# Altium PCB OPAMP_DEV_SOT5_6-23.PcbDoc (part 2 of 2)
Units mm, origin at the board's own origin, x right, y up, seen from the top; angles counter-clockwise.
Board outline 91.45 x 80 mm, 4 copper layers (Top Layer, Layer 1, Layer 2, Bottom Layer), stack 1.586 mm thick; 58 components, 23 nets, 145 pads, 362 vias.
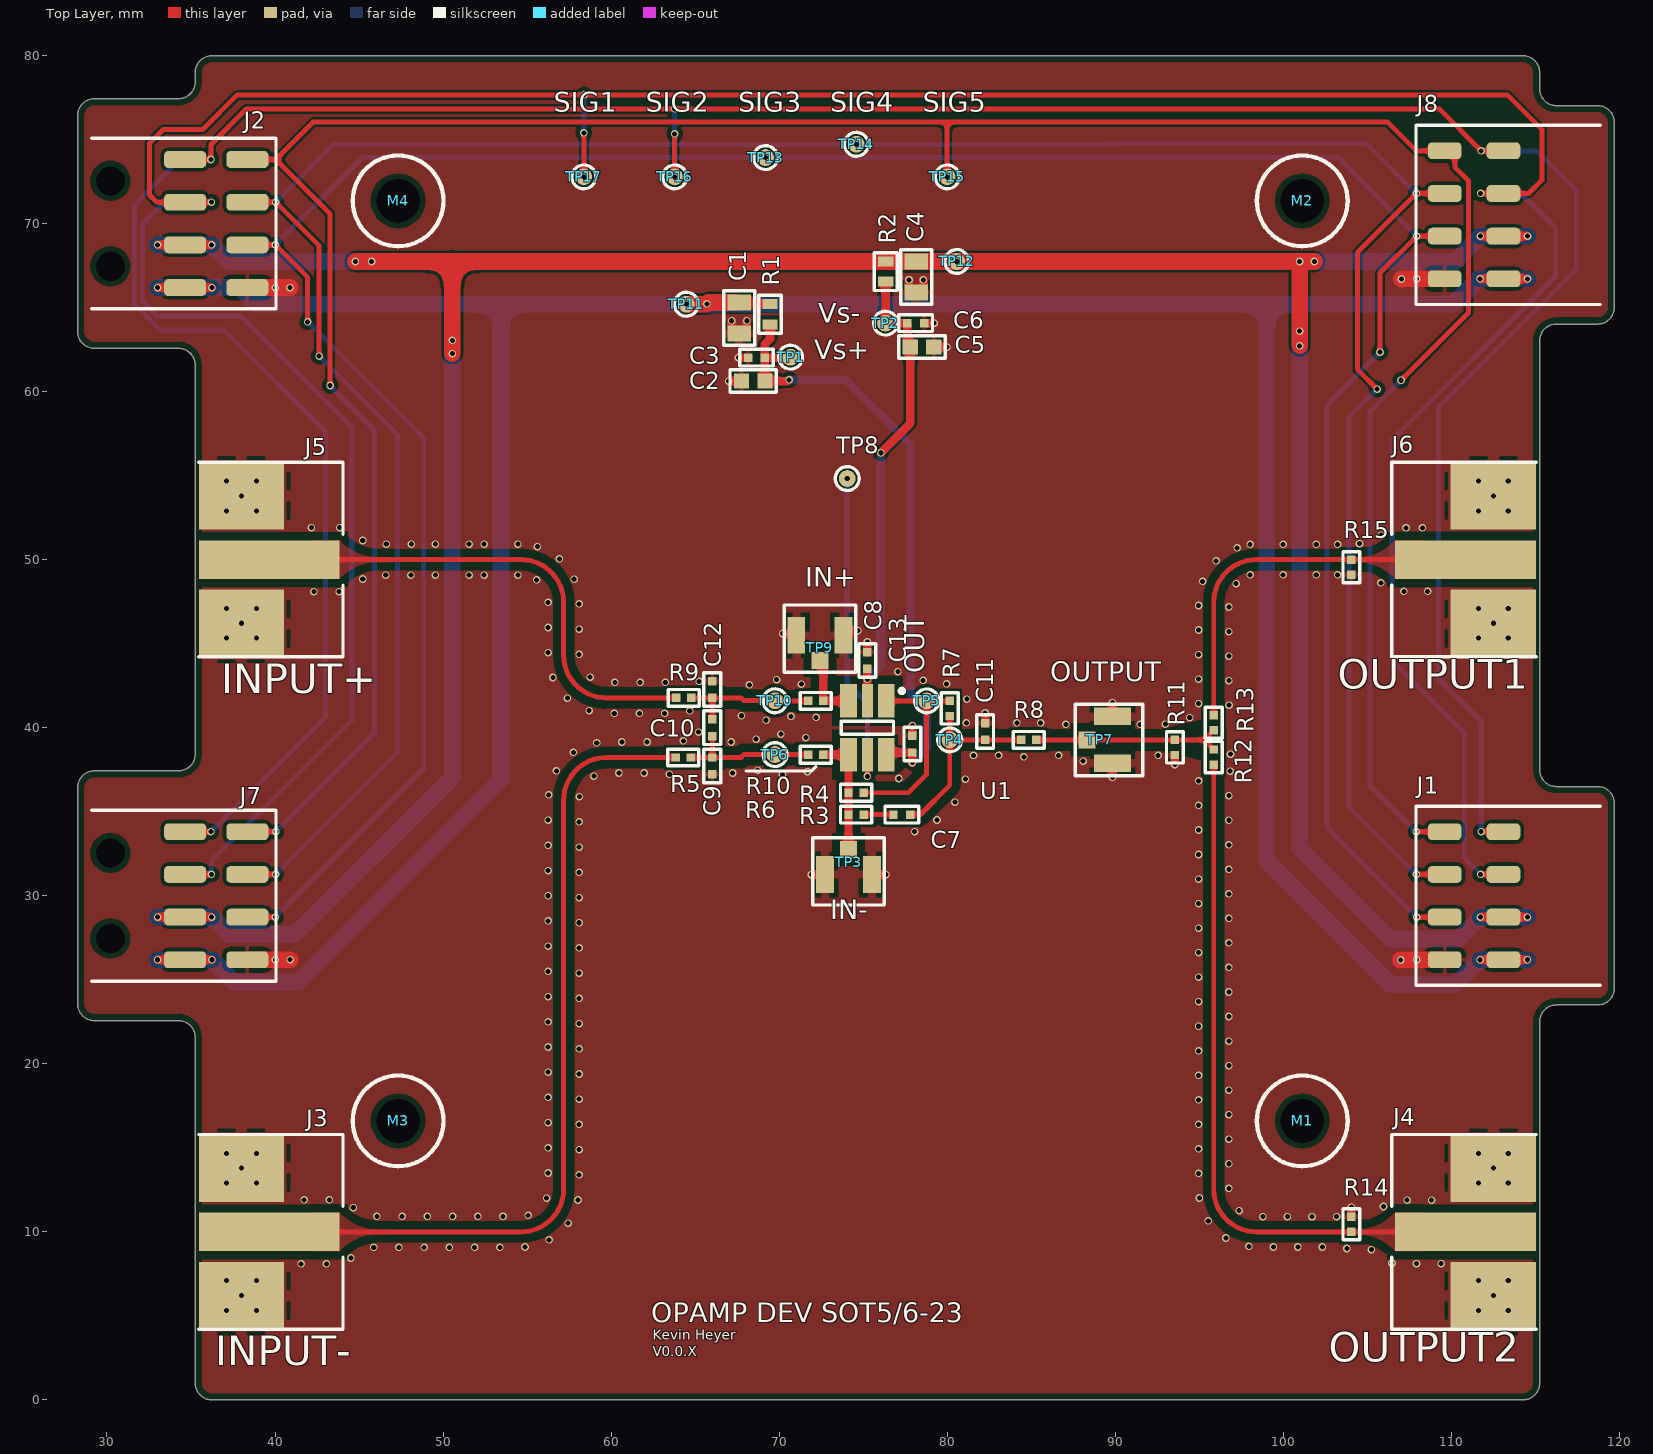
[diagram p0: Top Layer view]

## Other copper (continued)
Bottom Layer: (continued)
  pour cut-out: 112.926,8.574 ccw(c112.926,8.474) 112.926,8.373 113.826,8.373 ccw(c113.826,8.474) 113.826,8.574
  pour cut-out: 111.158,11.426 cw(c111.158,11.526) 111.158,11.627 112.058,11.627 cw(c112.058,11.526) 112.058,11.426
  pour cut-out: 112.926,11.426 cw(c112.926,11.526) 112.926,11.627 113.826,11.627 cw(c113.826,11.526) 113.826,11.426
  pour cut-out: 38.426,43.853 cw(c38.426,43.953) 38.426,44.054 39.326,44.054 cw(c39.326,43.953) 39.326,43.853
  pour cut-out: 36.658,43.853 cw(c36.658,43.953) 36.658,44.054 37.558,44.054 cw(c37.558,43.953) 37.558,43.853
  pour cut-out: 40.906,44.856 cw(c40.805,44.856) 40.705,44.856 40.705,45.756 cw(c40.805,45.756) 40.906,45.756
  pour cut-out: 40.906,46.624 cw(c40.805,46.624) 40.705,46.624 40.705,47.524 cw(c40.805,47.524) 40.906,47.524
  pour cut-out: 40.906,55.144 ccw(c40.805,55.144) 40.705,55.144 40.705,54.244 ccw(c40.805,54.244) 40.906,54.244
  pour cut-out: 40.906,53.376 ccw(c40.805,53.376) 40.705,53.376 40.705,52.476 ccw(c40.805,52.476) 40.906,52.476
  pour cut-out: 38.426,56.147 ccw(c38.426,56.047) 38.426,55.946 39.326,55.946 ccw(c39.326,56.047) 39.326,56.147
  pour cut-out: 36.658,56.147 ccw(c36.658,56.047) 36.658,55.946 37.558,55.946 ccw(c37.558,56.047) 37.558,56.147
  pour cut-out: 38.426,3.853 cw(c38.426,3.953) 38.426,4.054 39.326,4.054 cw(c39.326,3.953) 39.326,3.853
  pour cut-out: 36.658,3.853 cw(c36.658,3.953) 36.658,4.054 37.558,4.054 cw(c37.558,3.953) 37.558,3.853
  pour cut-out: 40.906,4.856 cw(c40.805,4.856) 40.705,4.856 40.705,5.756 cw(c40.805,5.756) 40.906,5.756
  pour cut-out: 40.906,6.624 cw(c40.805,6.624) 40.705,6.624 40.705,7.524 cw(c40.805,7.524) 40.906,7.524
  pour cut-out: 40.906,15.144 ccw(c40.805,15.144) 40.705,15.144 40.705,14.244 ccw(c40.805,14.244) 40.906,14.244
  pour cut-out: 40.906,13.376 ccw(c40.805,13.376) 40.705,13.376 40.705,12.476 ccw(c40.805,12.476) 40.906,12.476
  pour cut-out: 38.426,16.147 ccw(c38.426,16.047) 38.426,15.946 39.326,15.946 ccw(c39.326,16.047) 39.326,16.147
  pour cut-out: 36.658,16.147 ccw(c36.658,16.047) 36.658,15.946 37.558,15.946 ccw(c37.558,16.047) 37.558,16.147
  pour cut-out: 112.074,3.853 ccw(c112.074,3.953) 112.074,4.054 111.174,4.054 ccw(c111.174,3.953) 111.174,3.853
  pour cut-out: 113.842,3.853 ccw(c113.842,3.953) 113.842,4.054 112.942,4.054 ccw(c112.942,3.953) 112.942,3.853
  pour cut-out: 109.594,4.856 ccw(c109.695,4.856) 109.795,4.856 109.795,5.756 ccw(c109.695,5.756) 109.594,5.756
  pour cut-out: 109.594,6.624 ccw(c109.695,6.624) 109.795,6.624 109.795,7.524 ccw(c109.695,7.524) 109.594,7.524
  pour cut-out: 109.594,15.144 cw(c109.695,15.144) 109.795,15.144 109.795,14.244 cw(c109.695,14.244) 109.594,14.244
  pour cut-out: 109.594,13.376 cw(c109.695,13.376) 109.795,13.376 109.795,12.476 cw(c109.695,12.476) 109.594,12.476
  pour cut-out: 112.074,16.147 cw(c112.074,16.047) 112.074,15.946 111.174,15.946 cw(c111.174,16.047) 111.174,16.147
  pour cut-out: 113.842,16.147 cw(c113.842,16.047) 113.842,15.946 112.942,15.946 cw(c112.942,16.047) 112.942,16.147
  pour cut-out: 112.074,43.853 ccw(c112.074,43.953) 112.074,44.054 111.174,44.054 ccw(c111.174,43.953) 111.174,43.853
  pour cut-out: 113.842,43.853 ccw(c113.842,43.953) 113.842,44.054 112.942,44.054 ccw(c112.942,43.953) 112.942,43.853
  pour cut-out: 109.594,44.856 ccw(c109.695,44.856) 109.795,44.856 109.795,45.756 ccw(c109.695,45.756) 109.594,45.756
  pour cut-out: 109.594,46.624 ccw(c109.695,46.624) 109.795,46.624 109.795,47.524 ccw(c109.695,47.524) 109.594,47.524
  pour cut-out: 109.594,55.144 cw(c109.695,55.144) 109.795,55.144 109.795,54.244 cw(c109.695,54.244) 109.594,54.244
  pour cut-out: 109.594,53.376 cw(c109.695,53.376) 109.795,53.376 109.795,52.476 cw(c109.695,52.476) 109.594,52.476
  pour cut-out: 112.074,56.147 cw(c112.074,56.047) 112.074,55.946 111.174,55.946 cw(c111.174,56.047) 111.174,56.147
  pour cut-out: 113.842,56.147 cw(c113.842,56.047) 113.842,55.946 112.942,55.946 cw(c112.942,56.047) 112.942,56.147
Layer 1 (plane layer: these items are gaps in the copper):
  pour cut-out: 71.55,44.799 71.55,43.405 72.175,42.781 72.175,40.994 72.575,40.594 74.925,40.594 74.925,43.787 73.925,44.787
  pour cut-out: 72.175,38.994 72.175,33.7 73.625,32.25 75.25,32.25 75.25,39.394 72.575,39.394
Layer 2 (plane layer: these items are gaps in the copper):
  pour cut-out: 71.55,44.799 71.55,43.405 72.175,42.781 72.175,40.994 72.575,40.594 74.853,40.594 74.853,43.859 73.925,44.787
  pour cut-out: 72.175,38.994 72.175,33.7 73.625,32.25 75.25,32.25 75.25,39.394 72.575,39.394

## Silkscreen, mask and mechanical layers (free items; w line width, h text height)
Top Overlay:
  lines w0.2: 68.05,37.425 71.926,37.425 72.171,37.67
  text "SIG1" at 56.575,76.267 h2
  text "SIG2" at 62.065,76.267 h2
  text "SIG3" at 67.556,76.267 h2
  text "SIG4" at 73.046,76.267 h2
  text "SIG5" at 78.537,76.267 h2
  text "Vs-" at 72.325,63.717 h2
  text "Vs+" at 72.075,61.542 h2
  text "IN+" at 71.55,48 h2
  text "OUT" at 79.016,43.246 h2 r90
  text "OUTPUT" at 86.125,42.367 h2
  text "OUTPUT1" at 103.225,41.725 h3
  text "INPUT+" at 36.809,41.462 h3
  text "IN-" at 73.025,28.2 h2
  text "OPAMP DEV SOT5/6-23" at 62.4,4.222 h2
  text "Kevin Heyer / V0.0.X" at 62.475,2.375 h1
  text "OUTPUT2" at 102.7,1.675 h3
  text "INPUT-" at 36.429,1.462 h3
Bottom 3D Body Top/3D Body Bot:
  lines w0.2: 0,0 0,74.463 100,74.463 100,0 0,0
Board:
  lines w0.2: 114.231,79.994 36.25,79.994 ccw(c36.25,78.994) 35.25,78.994 35.25,78.43 cw(c34.25,78.43) 34.25,77.43 29.25,77.43 ccw(c29.25,76.43) 28.25,76.43 28.25,70 28.25,63.57 ccw(c29.25,63.57) 29.25,62.57 34.25,62.57 cw(c34.25,61.57) 35.25,61.57 35.25,38.43 cw(c34.25,38.43) 34.25,37.43 29.25,37.43 ccw(c29.25,36.43) 28.25,36.43 28.25,30 28.25,23.57 ccw(c29.25,23.57) 29.25,22.57 34.25,22.57 cw(c34.25,21.57) 35.25,21.57 35.25,0.994 ccw(c36.25,0.994) 36.25,-0.006 114.25,-0.006 ccw(c114.25,0.994) 115.25,0.994 115.25,22.5 cw(c116.25,22.5) 116.25,23.5 118.701,23.5 ccw(c118.701,24.5) 119.701,24.5 119.701,30 119.701,35.5 ccw(c118.701,35.5) 118.701,36.5 116.25,36.5 cw(c116.25,37.5) 115.25,37.5 115.25,63.02 cw(c116.25,63.02) 116.25,64.02 118.701,64.02 ccw(c118.701,65.02) 119.701,65.02 119.701,70.52 119.701,76.02 ccw(c118.701,76.02) 118.701,77.02 116.25,77.02 cw(c116.25,78.02) 115.25,78.02 115.25,78.994 ccw(c114.25,78.994) 114.25,79.994 ; 115.25,77.95 115.25,77.959